# Altium PCB pcb_show_voltage.PcbDoc
Units mm, origin at the board's own origin, x right, y up, seen from the top; angles counter-clockwise.
Board outline 63.75 x 40.39 mm, 2 copper layers (Top Layer, Bottom Layer); 15 components, 15 nets, 66 pads, 3 vias.
Unrouted connection lines stored in the file: 1.
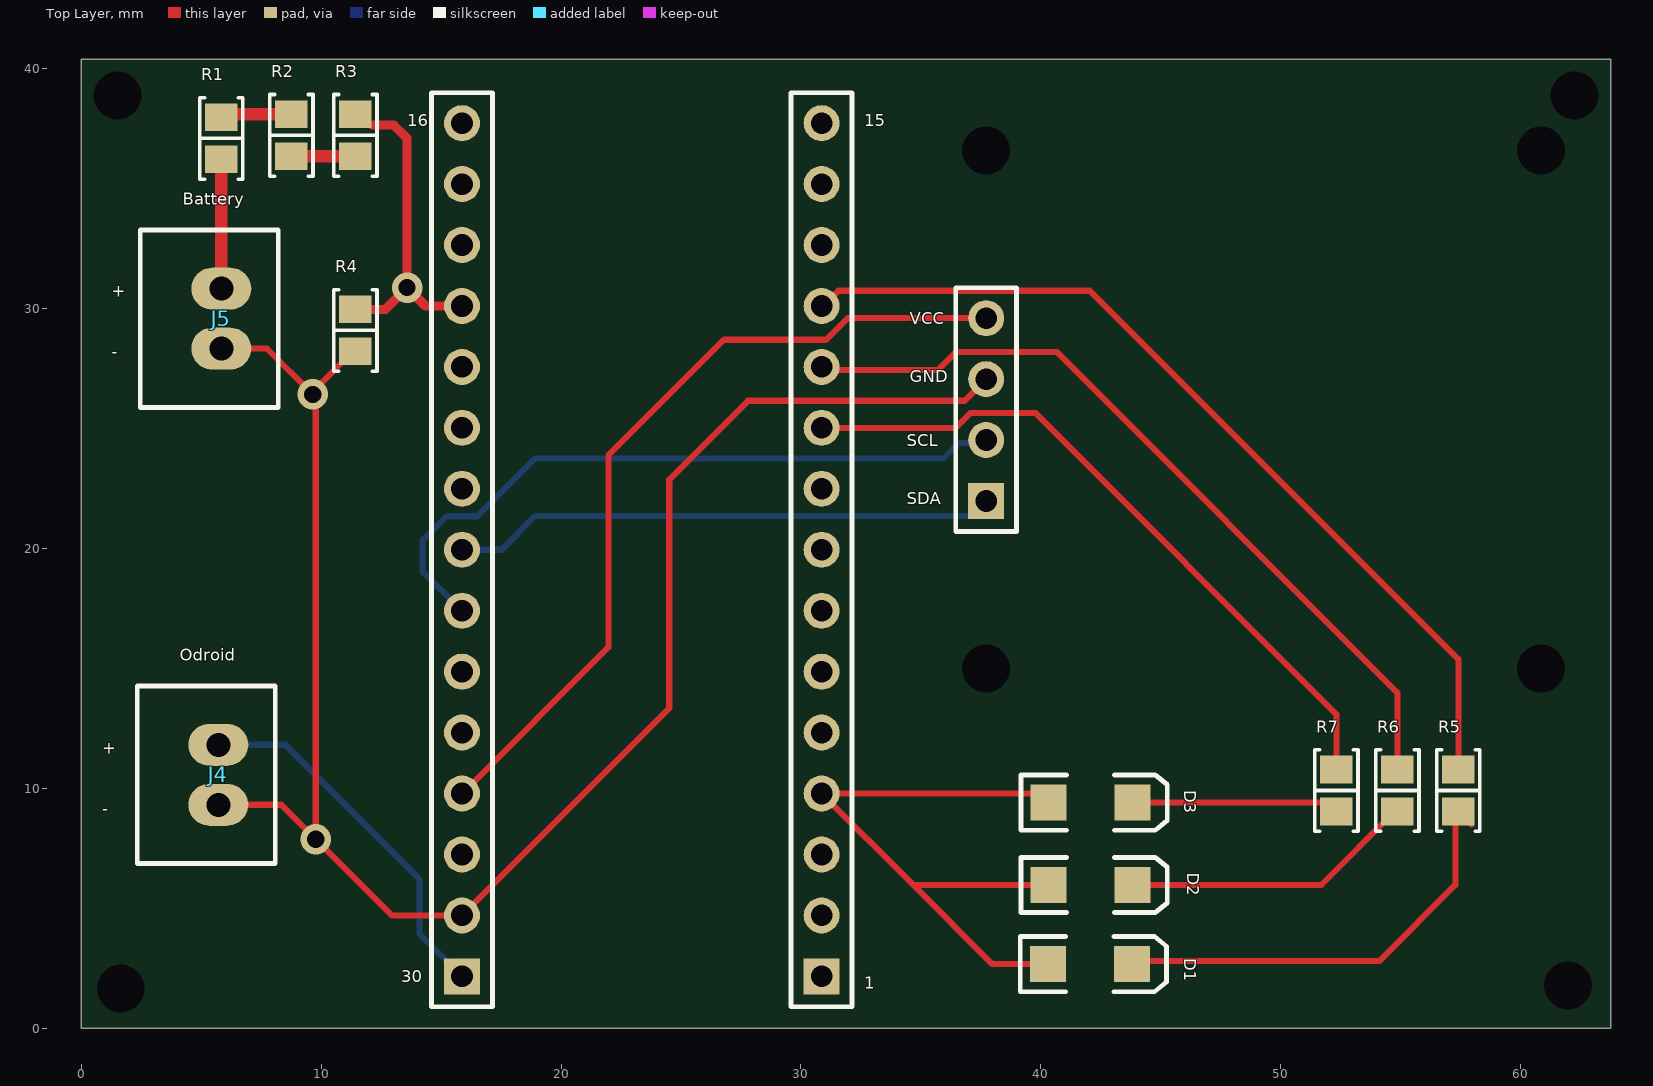
[diagram p0: Top Layer view]
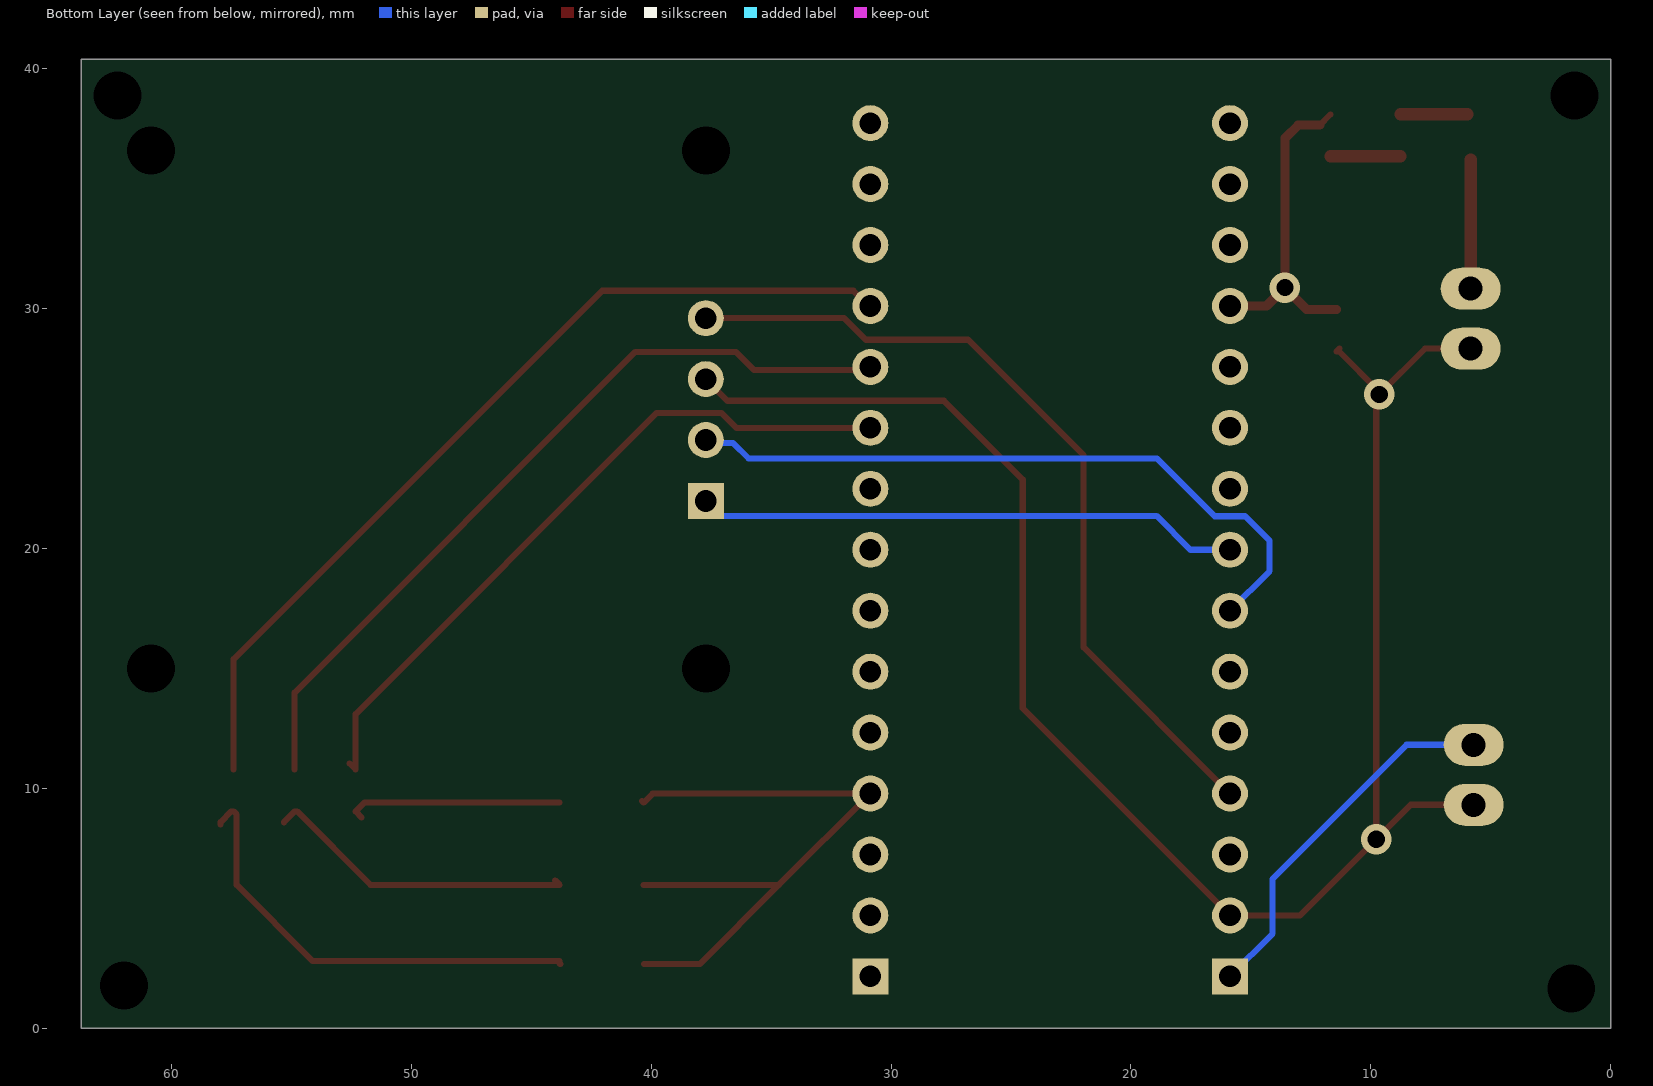
[diagram p1: Bottom Layer view, seen from below]
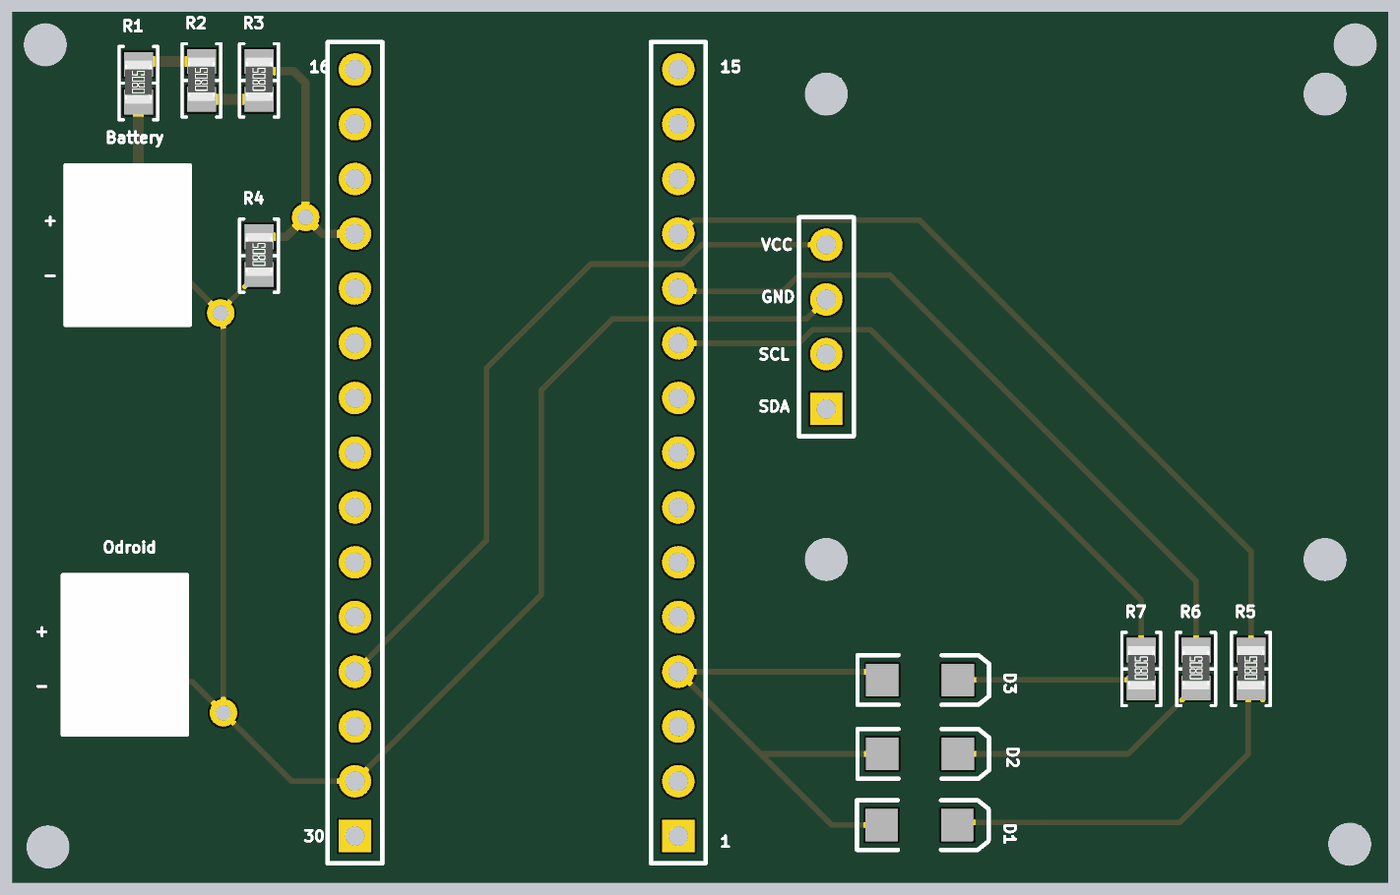
[diagram p2: 3D render of the assembled board from above, using the file's embedded part models]

## Layer stack, top to bottom
Top Solder: solder mask 0.0102, Solder Resist, Dk 3.5
Top Layer: signal copper 0.0356
Dielectric 1: dielectric 0.32, FR-4, Dk 4.8
Bottom Layer: signal copper 0.0356
Bottom Solder: solder mask 0.0102, Solder Resist, Dk 3.5

## Board outline
0,40.386 63.754,40.386 63.754,0 0,0

## Design rules (kind name [scope] priority, off if disabled: settings)
Clearance [All] p1: gap=0.254 ignorepadtopadclearanceinfootprint=FALSE except(0: Arc-Hole Track-Hole SMDPad-Hole THPad-Hole Via-Hole Fill-Hole Poly-Hole Region-Hole Text-Hole)
PolygonConnect [All] p1: connectstyle=Relief reliefconductorwidth=0.254 reliefentries=4 polygonreliefangle="90 Angle" airgapwidth=0.254
RoutingVias [All] p1: holewidth=0.711 width=1.27 viastyle="Through Hole" minholewidth=0.711 minwidth=1.27 maxholewidth=0.711 maxwidth=1.27
SolderMaskExpansion [All] p1: expansion=0.102
Width [All] p1: maxlimit=0.508 minlimit=0.254 preferedwidth=0.254
30 further rules are at their usual default settings.

## Classes and differential pairs
component class updated_sheet_for_arduino_nano: J1 J2

## Components (designator, comment, footprint, x,y, rotation, side; value= is the part's Value field where it differs from the comment)
D2 "LED_YELLOW" 3.2X1.6X1.1 42.065,5.969 r0 top
D3 "LED_GREEN" 3.2X1.6X1.1 42.065,9.398 r0 top
J4 "Odroid" "JST XH B2B-XH-A" 5.715,10.561 r270 top
J5 "Battery" "JST XH B2B-XH-A" 5.842,29.571 r270 top
R1 "100k" "RES 0805/2012" 5.842,37.084 r90 top (schematic designator R25)
R2 "100k" "RES 0805/2012" 8.763,37.211 r90 top (schematic designator R25)
R3 "100k" "RES 0805/2012" 11.43,37.211 r90 top
R4 "100k" "RES 0805/2012" 11.43,29.083 r90 top
R5 "100k" "RES 0805/2012" 57.396,9.906 r90 top
R6 "100k" "RES 0805/2012" 54.856,9.906 r90 top
R7 "100k" "RES 0805/2012" 52.316,9.906 r90 top
VCC "Header 4" HDR1X4 37.719,21.971 r90 top (schematic designator P3)
? "Header 15" HDR1X15 15.875,2.159 r90 top
? "Header 15" HDR1X15 30.861,2.159 r90 top
? "LED_RED" 3.2X1.6X1.1 42.037,2.667 r0 top

## Footprints (in the part's own frame and the unit in brackets; to place one, negate y for a bottom-side part, rotate by r counter-clockwise, add the part's x,y. Pads: shape width x height; smd on the part's side, far side on the other; paste and mask are expansions set on the pad)
3.2X1.6X1.1 [mm] "SMT LED; 2 Flat Leads"
  rect 1.5x1.5 smd: 1(-1.75,0) 2(1.75,0)
  silkscreen extent -2.9,-1.15 3.2,1.15
HDR1X4 [mm] "Connector; Header; 4 Position"
  rect 1.5x1.5 hole 0.9: 1(0,0)
  round 1.5 hole 0.9: 2(2.54,0) 3(5.08,0) 4(7.62,0)
  silkscreen extent -1.27,-1.27 8.89,1.27
HDR1X15 [mm] "Connector; Header; 15 Position"
  rect 1.5x1.5 hole 0.9: 1(0,0)
  round 1.5 hole 0.9: 2(2.54,0) 3(5.08,0) 4(7.62,0) 5(10.16,0) 6(12.7,0) 7(15.24,0) 8(17.78,0) 9(20.32,0) 10(22.86,0) 11(25.4,0) 12(27.94,0) 13(30.48,0) 14(33.02,0) 15(35.56,0)
  silkscreen extent -1.27,-1.27 36.83,1.27
"JST XH B2B-XH-A" [mm]
  oval 1.75x2.5 hole 1: 1(-1.25,0) 2(1.25,0)
  silkscreen extent -3.7,-3.38 3.7,2.38, body extent -3.7,-3.38 3.7,2.38, height 7
"RES 0805/2012" [mm] "Chip Resistor, 2-Leads, Body 2.00x1.25mm, IPC Medium Density"
  rect 1.15x1.35 smd: 1(-0.875,0) 2(0.875,0)
  silkscreen extent -1.7,-0.9 1.7,0.9, body extent -0.95,-0.62 1.05,0.63, height 0.6

## Part data
D2: library part LED2, "GREEN", LatestRevisionDate=17-Jul-2002, LatestRevisionNote="Re-released for DXP Platform.", PackageDescription="SM LED; 2 Flat Leads", PackageReference=3.2X1.6X1.1, PackageVersion=Feb-2002, Published=8-Jun-2000, Publisher="Altium Limited"
D3: library part LED2, "YELLOW", LatestRevisionDate=17-Jul-2002, LatestRevisionNote="Re-released for DXP Platform.", PackageDescription="SM LED; 2 Flat Leads", PackageReference=3.2X1.6X1.1, PackageVersion=Feb-2002, Published=8-Jun-2000, Publisher="Altium Limited"
J4 J5: library part B2B-XH-A(LF)(SN), "CONN HEADER XH TOP 2POS 2.5MM", Colour=Natural, Manufacturer="JST Sales America Inc.", Supplier Part Number 1=455-2247-ND, ComponentLink1Description=Datasheet, ComponentLink1URL=http://www.jst-mfg.com/product/pdf/eng/eXH.pdf, ComponentLink2Description="Digi-Key Listing", ComponentLink2URL=http://www.digikey.com/product-detail/en/jst-sales-america-inc/B2B-XH-A(LF)(SN)/455-2247-ND/1651045, Contact Finish=Tin, Fastening Type="Detent Lock", Number Of Positions=2, Number Of Rows=1, PartId=16449, Part Number=B2B-XH-A(LF)(SN), Pitch="0.098\" (2.50mm)", Price=0,15, Series=XH, Supplier 1=Digi-Key, Type="Header, Shrouded"
R1 R2 R3 R4 R5 R6 R7: library part ERJ-6GEYJ104V, "RES SMD 100K OHM 5% 1/8W 0805", Device Package="0805 (2012 Metric)", Manufacturer="Panasonic Electronic Components", PowerRating="0.125W, 1/8W", Supplier Part Number 1=P100KATR-ND, TemperatureCoefficient=200ppm/C, TemperatureRange="-55C ~ 155C", Tolerance=5%, ComponentLink1Description=Datasheet, ComponentLink1URL=http://industrial.panasonic.com/www-cgi/jvcr13pz.cgi?E+PZ+3+AOA0001+ERJ6GEYJ104V+7+WW, ComponentLink2Description="Digi-Key Listing", ComponentLink2URL=https://www.digikey.com/product-detail/en/panasonic-electronic-components/ERJ-6GEYJ104V/P100KATR-ND/83110, PartId=11445, Part Number=ERJ-6GEYJ104V, Price=0,0032, Supplier 1=Digi-Key
VCC: "Header, 4-Pin", LatestRevisionDate=17-Jul-2002, LatestRevisionNote="Re-released for DXP Platform.", Publisher="Altium Limited"
? ?: "Header, 15-Pin", LatestRevisionDate=17-Jul-2002, LatestRevisionNote="Re-released for DXP Platform.", Publisher="Altium Limited"
?: library part LED2, "RED", LatestRevisionDate=17-Jul-2002, LatestRevisionNote="Re-released for DXP Platform.", PackageDescription="SM LED; 2 Flat Leads", PackageReference=3.2X1.6X1.1, PackageVersion=Feb-2002, Published=8-Jun-2000, Publisher="Altium Limited"

## Free pads (board coordinates)
  round 0 hole 2 unplated: 3(1.524,38.862) 3(1.651,1.651) 3(37.719,14.986) 3(37.719,36.576) 3(60.833,14.986) 3(60.833,36.576) 3(61.976,1.778) 3(62.23,38.862)

## Via types
v1: diameter 1.27, hole 0.711, Top Layer to Bottom Layer, 3 vias

## Nets (pads, with @x,y where several pads share a name; then routed paths per layer and width w, separated by ;. In a path a pad name is that pad's centre, name@x,y a point inside that pad or via, vN(x,y) a via of type N, cw(c..) or ccw(c..) an arc to the next point about the centre after c; other vN are vias at no path point)
Net_1: ?.2@15.875,4.699 J4.2 J5.1 J5.2 R1.1 R4.1 VCC.3 | length 80.3
  Top Layer w0.254: J4.2 8.342,9.311 v1(9.779,7.874) ; J5.2 7.747,28.321 v1(9.652,26.416) ; R1.1@5.842,36.082 R1.1@5.969,36.209 ; R4.1@11.317,28.321 R4.1 11.33,28.208 9.652,26.53 v1(9.652,26.416) ; VCC.3 36.818,26.15 27.801,26.15 24.511,22.86 24.511,13.335 15.875,4.699 12.954,4.699 v1(9.779,7.874) ; v1(9.652,26.416) 9.779,26.289 v1(9.779,7.874)
  Top Layer w0.508: J5.1 5.842,36.082 R1.1
Net_2: ?.1@15.875,2.159 J4.1 | length 15.5
  Bottom Layer w0.254: J4.1 8.509,11.811 14.097,6.223 14.097,3.937 ?.1@15.875,2.159
NetD3_1: ?.1@40.287,2.667 ?.4@30.861,9.779 D2.1 D3.1 | length 27.7
  Top Layer w0.254: ?.1@40.287,2.667 37.973,2.667 34.671,5.969 ; D2.1 34.671,5.969 ; D3.1@40.386,9.469 D3.1 39.934,9.779 30.861,9.779 34.671,5.969
NetJ1_1: D3.2 R7.1 | length 9
  Top Layer w0.254: D3.2 51.949,9.398 R7.1 R7.1@52.062,8.777
NetJ1_2: D2.2 R6.1 | length 13.2
  Top Layer w0.254: D2.2@44.002,6.156 D2.2 51.694,5.969 54.756,9.031 R6.1 R6.1@55.304,8.583
NetJ2_1: ?.2@43.787,2.667 R5.1 | length 18.9
  Top Layer w0.254: ?.2@43.787,2.667 43.815,2.695 43.815,2.794 54.102,2.794 57.277,5.969 57.277,8.912 R5.1 57.496,9.031 57.944,8.583 R5.1@57.944,8.483
NetP1_4: ?.10@30.861,25.019 R7.2 | length 29.6
  Top Layer w0.254: ?.10@30.861,25.019 36.449,25.019 37.072,25.642 39.763,25.642 52.316,13.089 R7.2 R7.2@52.57,11.035
NetP1_8: ?.8@15.875,19.939 VCC.1 | length 22.7
  Bottom Layer w0.254: ?.8@15.875,19.939 17.526,19.939 18.935,21.348 37.096,21.348 VCC.1
NetP1_9: ?.4@15.875,9.779 VCC.4 | length 34.7
  Top Layer w0.254: ?.4@15.875,9.779 21.971,15.875 21.971,23.876 26.785,28.69 31.051,28.69 31.952,29.591 VCC.4
NetP1_12: ?.12@15.875,30.099 R3.2 R4.2 | length 13.9
  Top Layer w0.254: R3.2@11.684,38.086 12.132,37.638 ; v1@13.575,30.875 v1(13.589,30.861) ; ?.12@15.734,29.958 ?.12@15.875,30.099
  Top Layer w0.381: R4.2 12.686,29.958 v1(13.589,30.861) 14.351,30.099 ?.12@15.875,30.099 ; 12.132,37.638 13.035,37.638 13.575,37.098 v1@13.575,30.875
NetP2_10: ?.7@15.875,17.399 VCC.2 | length 28.8
  Bottom Layer w0.254: ?.7@15.875,17.399 14.224,19.05 14.224,20.32 15.24,21.336 16.51,21.336 18.923,23.749 35.941,23.749 36.588,24.396 37.604,24.396 VCC.2
NetP2_11: ?.11@30.861,27.559 R6.2 | length 33.5
  Top Layer w0.254: ?.11@30.734,27.432 35.715,27.432 36.465,28.182 40.652,28.182 54.856,13.978 R6.2
NetP2_12: ?.12@30.861,30.099 R5.2 | length 37.9
  Top Layer w0.254: ?.12@30.734,30.099 ?.12@30.809,30.099 ; ?.12@30.809,29.972 31.571,30.734 42.037,30.734 57.396,15.375 R5.2
NetR1_1: R2.1 R3.1 | length 2.9
  Top Layer w0.508: R2.1 R3.1@11.684,36.336
NetR2_1: R1.2 R2.2 | length 2.8
  Top Layer w0.508: R1.2@5.969,38.086 R2.2
pads on no net: ?.1@30.861,2.159 ?.2@30.861,4.699 ?.3 ?.5 ?.6 ?.7@30.861,17.399 ?.8@30.861,19.939 ?.9 ?.10@15.875,25.019 ?.11@15.875,27.559 ?.13 ?.14 ?.15

## Silkscreen, mask and mechanical layers (free items; w line width, h text height)
Top Overlay:
  text "16" at 13.589,37.592 h0.51
  text "15" at 32.639,37.592 h0.51
  text "+" at 1.27,30.48 h0.51
  text "-" at 1.27,27.94 h0.51
  text "GND" at 34.544,26.924 h0.51
  text "SCL" at 34.417,24.257 h0.51
  text "SDA" at 34.417,21.844 h0.51
  text "+" at 0.889,11.43 h0.51
  text "-" at 0.889,8.89 h0.51
  text "D1" at 45.974,2.921 h0.51 r270
  text "30" at 13.335,1.905 h0.51
  text "1" at 32.639,1.651 h0.51